# Altium PCB PCB1.PcbDoc
Units mil, origin at the board's own origin, x right, y up, seen from the top; angles counter-clockwise.
Board outline 4960 x 4220 mil, 2 copper layers (Top Layer, Bottom Layer); 58 components, 59 nets, 259 pads, 74 vias.
Unrouted connection lines stored in the file: 2.
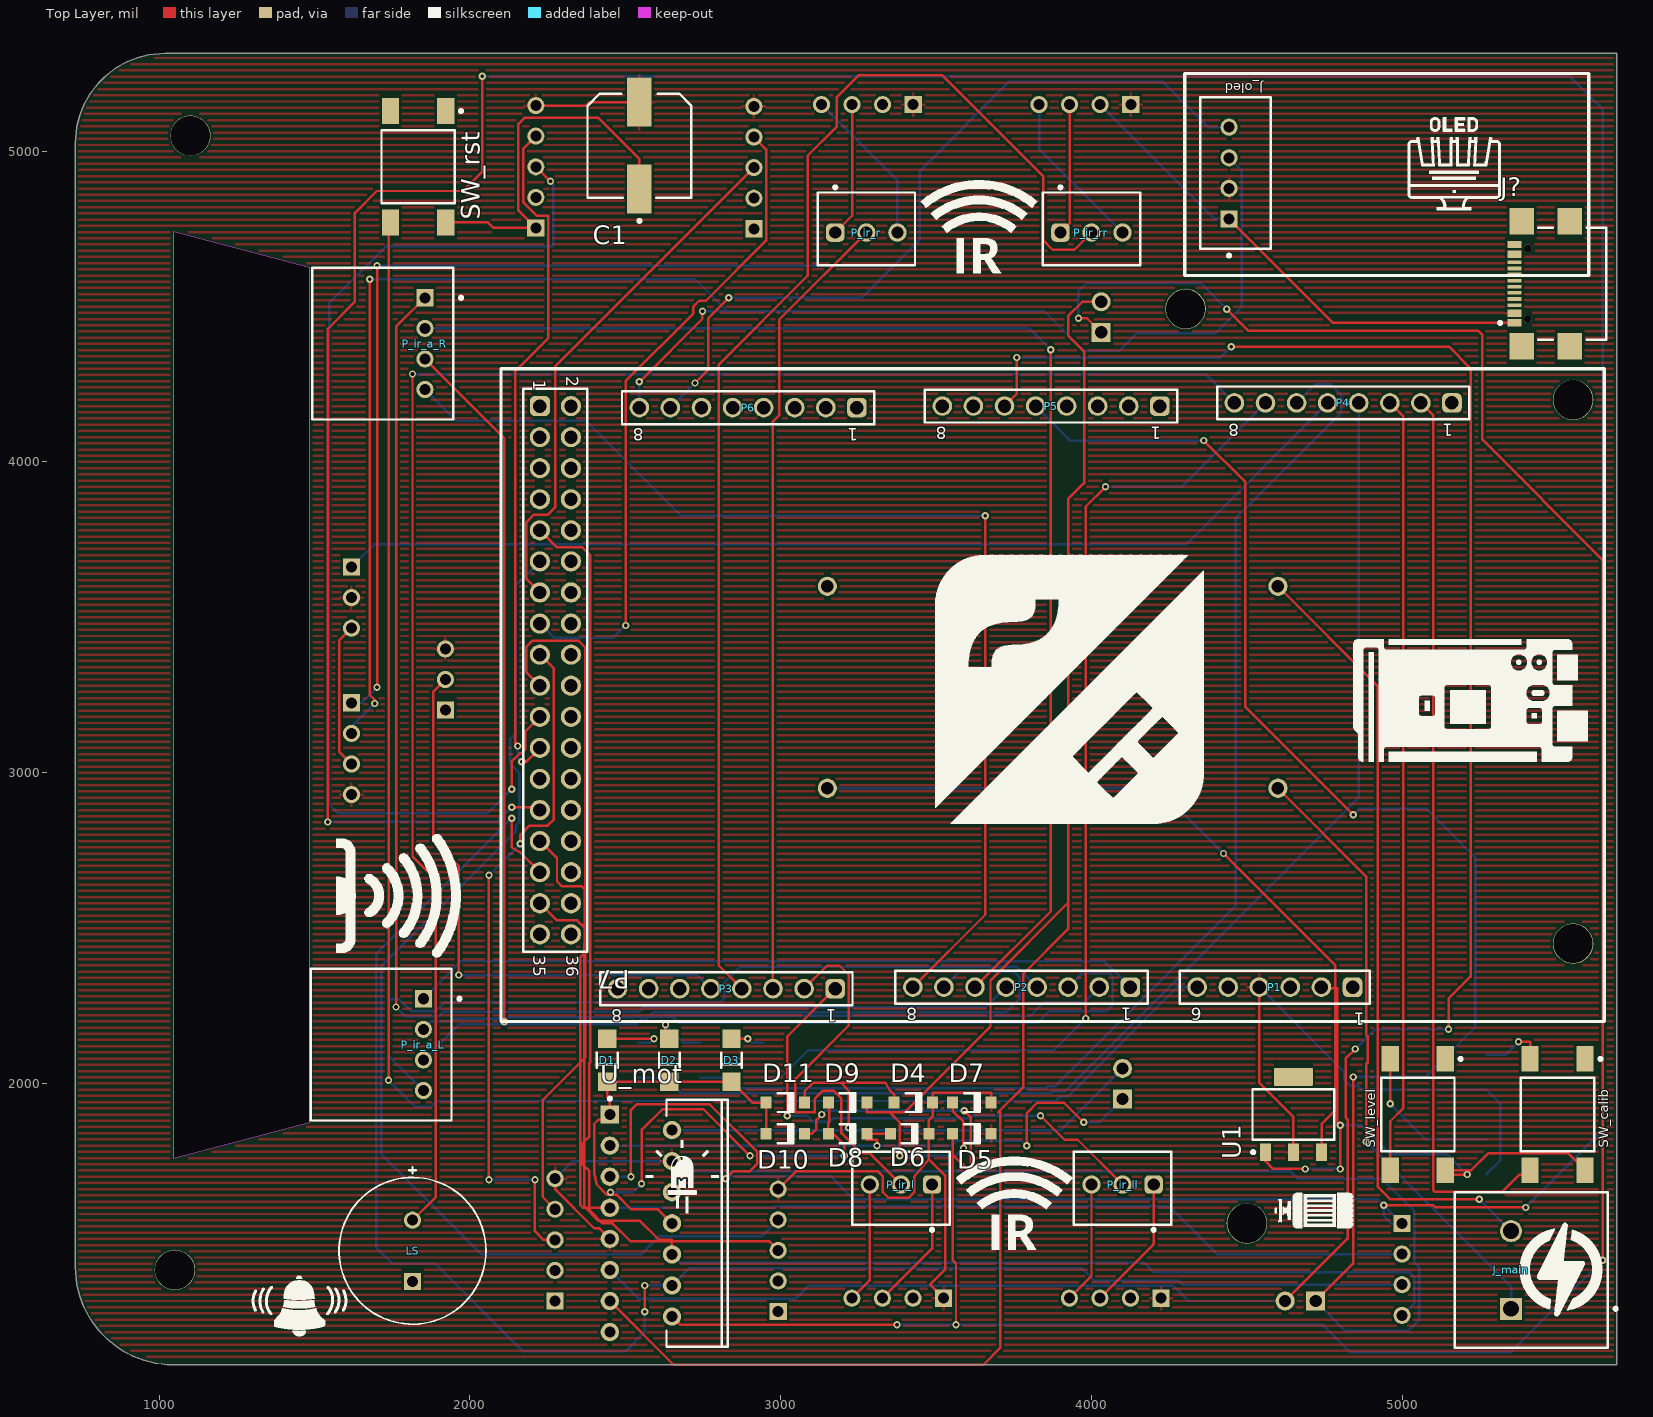
[diagram p0: Top Layer view]
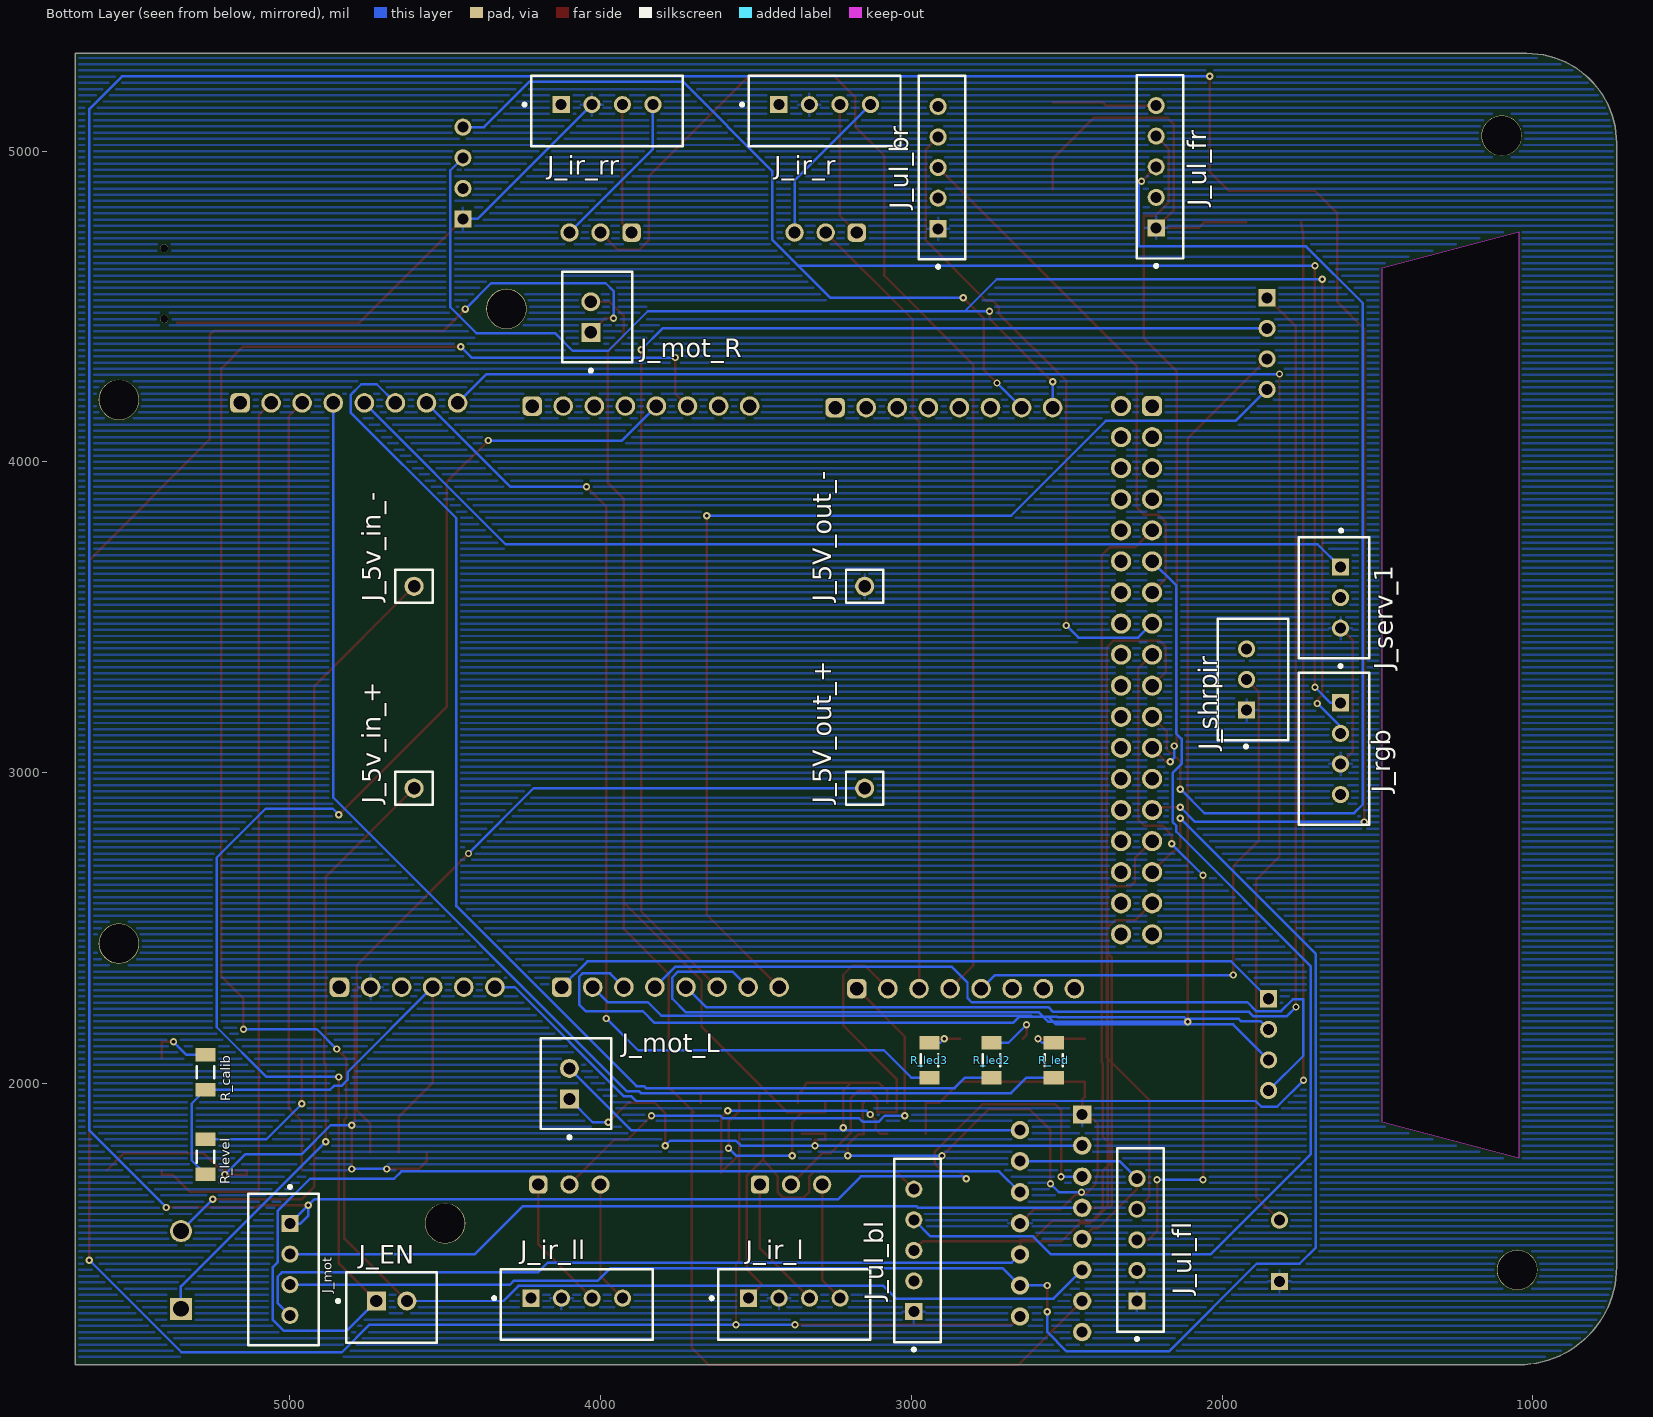
[diagram p1: Bottom Layer view, seen from below]
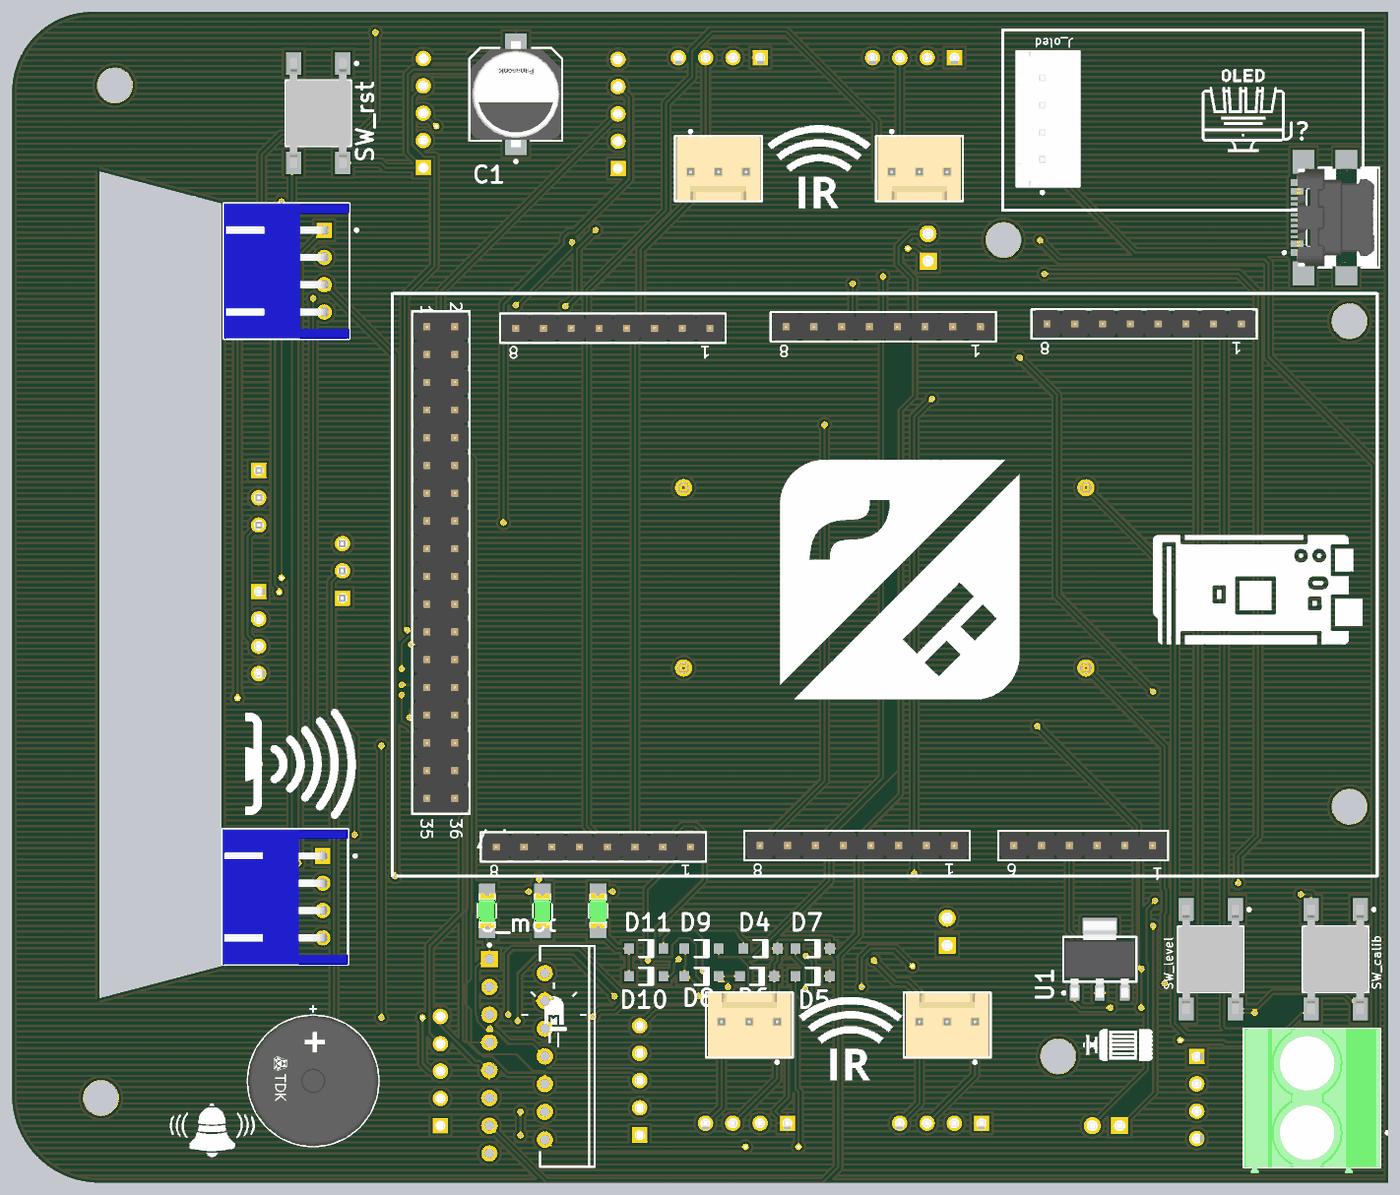
[diagram p2: 3D render of the assembled board from above, using the file's embedded part models]
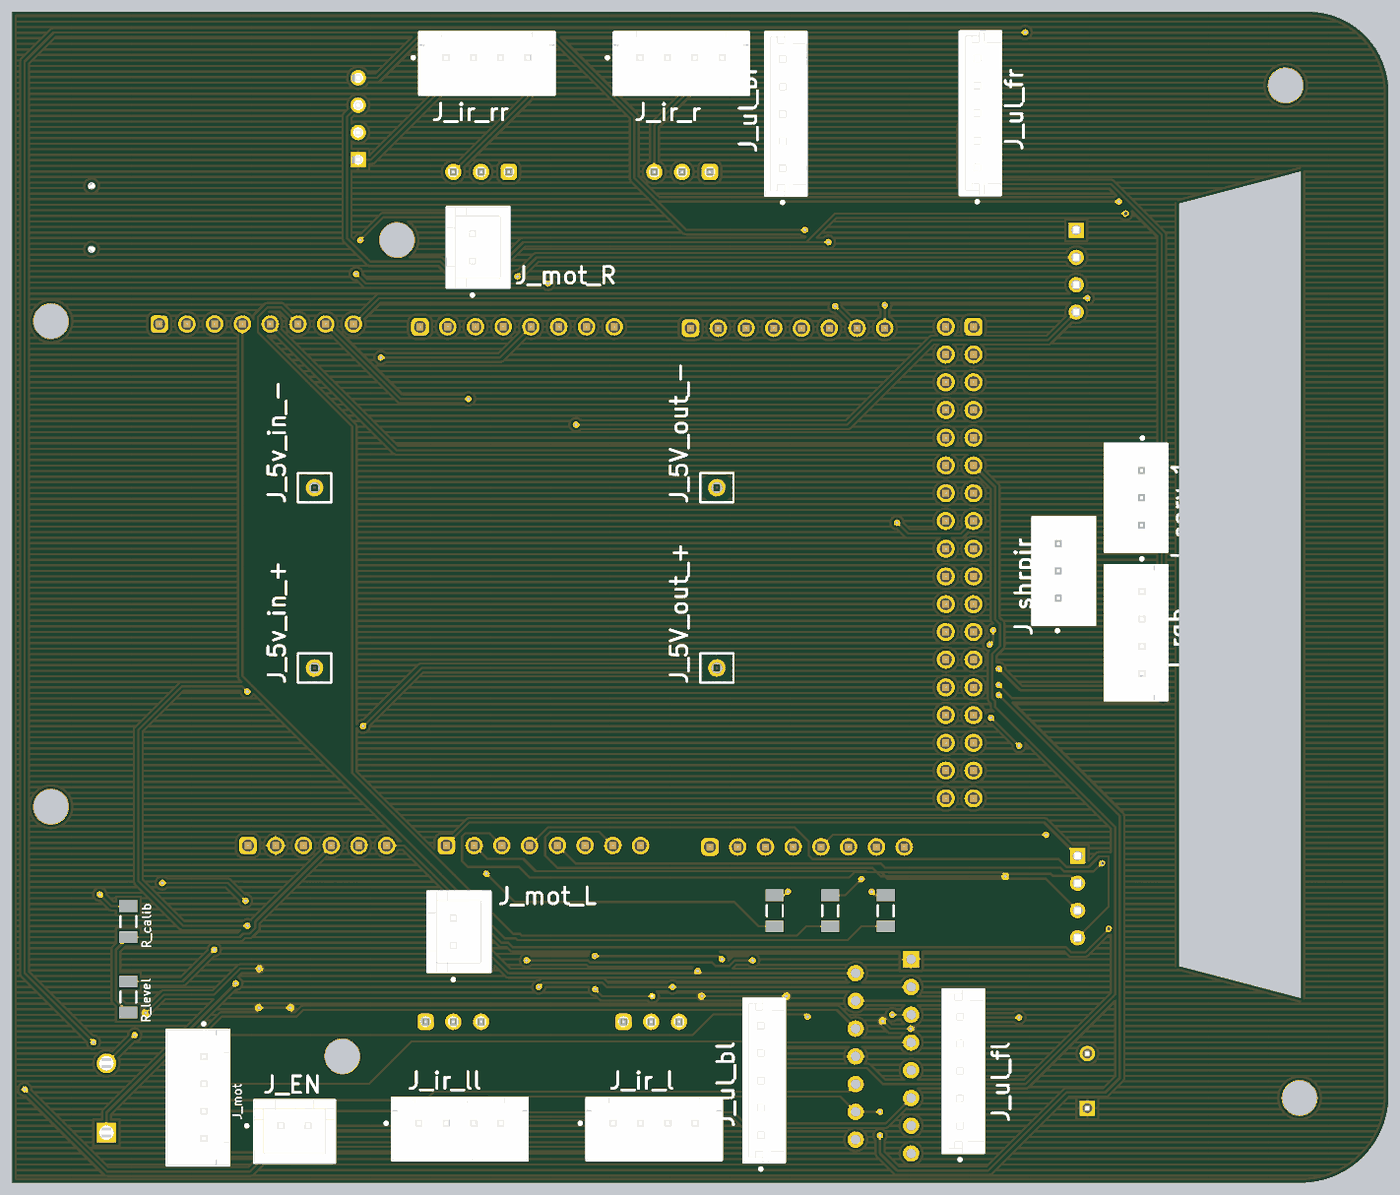
[diagram p3: 3D render of the assembled board from below, using the file's embedded part models]

## Layer stack, top to bottom
Top Solder: solder mask 0.4, Solder Resist, Dk 3.5
Top Layer: signal copper 1.4
Dielectric 1: dielectric 12.6, FR-4, Dk 4.8
Bottom Layer: signal copper 1.4
Bottom Solder: solder mask 0.4, Solder Resist, Dk 3.5

## Board outline
1020,5315 5690,5315 5690,1095 1045,1095 cw(c1045,1410) 730,1410 730,5025 cw(c1020,5025)
cut-out: 1045,4740.72 1045,1759.28 1485,1875 1485,4625

## Design rules (kind name [scope] priority, off if disabled: settings)
BoardOutlineClearance [All] p1: gap=7.87 ignorepadtopadclearanceinfootprint=FALSE
Clearance [All] p1: gap=8 ignorepadtopadclearanceinfootprint=FALSE except(9.84: Arc-Hole Track-Hole SMDPad-Hole THPad-Hole Via-Hole Fill-Hole Poly-Hole Region-Hole Text-Hole)
ComponentClearance [All] p1: gap=5 collisioncheckmode=3 verticalgap=5 showdistances=TRUE
DiffPairsRouting [All] p1: maxlimit=15 minlimit=8 mostfreqgap=8 toplayer_minwidth=8 toplayer_maxwidth=1000 toplayer_prefwidth=8 bottomlayer_minwidth=8 bottomlayer_maxwidth=1000 bottomlayer_prefwidth=8 maxuncoupledlength=500
Height [All] p1: minheight=0 maxheight=71497.94 prefheight=500
HoleSize [All] p1: absolutevalues=TRUE maxlimit=248.03 minlimit=11.81 maxpercent=80.000 minpercent=20.000
HoleToHoleClearance [All] p1: gap=9.84 allowstackedmicrovias=FALSE
MinimumAnnularRing [All] p1: minimumring=3
MinimumSolderMaskSliver [All] p1: minsoldermaskwidth=0
PlaneClearance [All] p1: clearance=8
PlaneConnect PlaneConnectPowerPads [InPadClass('PowerPads')] p1: planeconnectstyle=Direct reliefexpansion=20 reliefentries=4 reliefconductorwidth=10 reliefairgap=10
PlaneConnect [All] p2: pad.planeconnectstyle=Relief pad.reliefexpansion=11.81 pad.reliefentries=4 pad.reliefconductorwidth=8 pad.reliefairgap=8 via.planeconnectstyle=Direct via.reliefexpansion=11.81 via.reliefentries=4 via.reliefconductorwidth=5 via.reliefairgap=5
PolygonConnect PolygonConnectPowerPads [All vs (InPadClass('PowerPads'))] p1: connectstyle=Direct reliefconductorwidth=10 reliefentries=4 polygonreliefangle="90 Angle" airgapwidth=10
PolygonConnect [All] p2: thpad.connectstyle=Relief thpad.reliefconductorwidth=8 thpad.reliefentries=4 thpad.polygonreliefangle="90 Angle" thpad.airgapwidth=8 smdpad.connectstyle=Relief smdpad.reliefconductorwidth=8 smdpad.reliefentries=4 smdpad.polygonreliefangle="90 Angle" smdpad.airgapwidth=8 via.connectstyle=Direct via.reliefconductorwidth=5 via.reliefentries=4 via.polygonreliefangle="90 Angle" via.airgapwidth=5
RoutingVias [All] p1: holewidth=11.81 width=23.62 viastyle="Through Hole" minholewidth=11.81 minwidth=23.62 maxholewidth=23.62 maxwidth=259.84
SilkToSilkClearance [All] p1: silktosilkclearance=0
SilkToSolderMaskClearance [IsPad] p1: minsilkscreentomaskgap=5 clearancetoexposedcopper=TRUE
SolderMaskExpansion [All] p1: expansion=2.95 istentingtop=FALSE
Width [All] p1: maxlimit=1000 minlimit=11.93 preferedwidth=8 minimp=50.000000 maximp=50.000000 favimp=50.000000
20 further rules are at their usual default settings.

## Components (designator, comment, footprint, x,y, rotation, side; value= is the part's Value field where it differs from the comment)
C1 "EEEFT1H221AP" FP-FTF-MFG 2545.4,5018.11 r90 top
D1 "HSMG-C150" FP-HSMG-C150-MFG 2441.64,2074.81 r90 top
D2 "HSMG-C150" FP-HSMG-C150-MFG 2641.64,2074.81 r90 top
D3 "HSMG-C150" FP-HSMG-C150-MFG 2841.64,2074.81 r90 top
D4 "1N4148W-7-F" DIOD-SOD123-2_V 3426.94,1938.74 r0 top
D5 "1N4148W-7-F" DIOD-SOD123-2_V 3614.93,1838.74 r0 top
D6 "1N4148W-7-F" DIOD-SOD123-2_V 3414.93,1838.74 r0 top
D7 "1N4148W-7-F" DIOD-SOD123-2_V 3614.93,1938.74 r0 top
D8 "1N4148W-7-F" DIOD-SOD123-2_V 3214.93,1838.74 r0 top
D9 "1N4148W-7-F" DIOD-SOD123-2_V 3214.93,1938.74 r0 top
D10 "1N4148W-7-F" DIOD-SOD123-2_V 3014.93,1838.74 r0 top
D11 "1N4148W-7-F" DIOD-SOD123-2_V 3014.93,1938.74 r0 top
J? "USB4110-GF-A" FP-USB4110-GF-A-MFG 5506.36,4573.6 r90 top
J_5v_in_+ "PBC01SAAN" FP-PBC01SAAN-MFG 4600,2950 r0 bottom
J_5v_in_- "PBC01SAAN" FP-PBC01SAAN-MFG 4600,3600 r0 bottom
J_5V_out_+ "PBC01SAAN" FP-PBC01SAAN-MFG 3150,2950 r0 bottom
J_5V_out_- "PBC01SAAN" FP-PBC01SAAN-MFG 3150,3600 r0 bottom
J_EN "B2B-XH-A(LF)(SN)" FP-B2B-XH-A_LF_SN-MFG 4672.24,1279.33 r180 bottom
J_ir_l "B4B-XH-A(LF)(SN)" FP-B4B-XH-A_LF_SN-MFG 3376.38,1288.38 r0 bottom
J_ir_ll "B4B-XH-A(LF)(SN)" FP-B4B-XH-A_LF_SN-MFG 4076.38,1288.38 r0 bottom
J_ir_r "B4B-XH-A(LF)(SN)" FP-B4B-XH-A_LF_SN-MFG 3278.74,5129.33 r0 bottom
J_ir_rr "B4B-XH-A(LF)(SN)" FP-B4B-XH-A_LF_SN-MFG 3978.74,5129.33 r0 bottom
J_main "1714955" PHOE-1714955_V 5350,1400 r90 top
J_mot "B4B-XH-A(LF)(SN)" FP-B4B-XH-A_LF_SN-MFG 5020.04,1401.61 r90 bottom
J_mot_L "B2B-XH-A(LF)(SN)" FP-B2B-XH-A_LF_SN-MFG 4079.33,1999.21 r90 bottom
J_mot_R "B2B-XH-A(LF)(SN)" FP-B2B-XH-A_LF_SN-MFG 4010.49,4466.31 r90 bottom
J_oled "B4B-XH-A(LF)(SN)" FP-B4B-XH-A_LF_SN-MFG 4463.46,4929.7 r270 top
J_rgb "B4B-XH-A(LF)(SN)" FP-B4B-XH-A_LF_SN-MFG 1639.33,3077.36 r90 bottom
J_serv_1 "B3B-XH-A(LF)(SN)" FP-B3B-XH-A_LF_SN-MFG 1639.33,3563.42 r270 bottom
J_shrpir "B3B-XH-A(LF)(SN)" FP-B3B-XH-A_LF_SN-MFG 1900,3300 r90 bottom
J_ul_bl "B5B-EH-A(LF)(SN)" FP-B5B-EH-A_LF_SN-MFG 2980,1462.92 r90 bottom
J_ul_br "B5B-EH-A(LF)(SN)" FP-B5B-EH-A_LF_SN-MFG 2901.62,4947.24 r90 bottom
J_ul_fl "B5B-EH-A(LF)(SN)" FP-B5B-EH-A_LF_SN-MFG 2261.81,1496.85 r90 bottom
J_ul_fr "B5B-EH-A(LF)(SN)" FP-B5B-EH-A_LF_SN-MFG 2200,4950 r90 bottom
LS "SD1209T5-A1" FP-SD1209-MFG 1815,1461.57 r90 top
P1 "61300611121" 61300611121 4590,2310 r180 top
P2 "61300811121" 61300811121 3775,2310 r180 top
P3 "61300811121" 61300811121 2825,2305 r180 top
P4 "61300811121" 61300811121 4810,4190 r180 top
P5 "61300811121" 61300811121 3870,4180 r180 top
P6 "61300811121" 61300811121 2895,4175 r180 top
P7 "61303621121" 61303621121 2275,3330 r270 top
P_ir_a_L "S4B-XH-A(LF)(SN)" JST-S4B-XH-A(LF)(SN)_V 1850,2125 r270 top
P_ir_a_R "S4B-XH-A(LF)(SN)" JST-S4B-XH-A(LF)(SN)_V 1855,4380.79 r270 top
P_ir_l "61900311121" 61900311121 3386.77,1662.95 r0 top
P_ir_ll "61900311121" 61900311121 4100,1662.95 r0 top
P_ir_r "61900311121" 61900311121 3275.37,4750 r180 top
P_ir_rr "61900311121" 61900311121 4000,4750 r180 top
R_calib "ERJ-8GEY0R00V" RESC3216X70X50NL05T20 5271.15,2035.83 r90 bottom
R_led "ERJ-8GEY0R00V" RESC3216X70X50NL05T20 2541.62,2074.81 r90 bottom
R_led2 "ERJ-8GEY0R00V" RESC3216X70X50NL05T20 2741.62,2074.81 r90 bottom
R_led3 "ERJ-8GEY0R00V" RESC3216X70X50NL05T20 2941.62,2074.81 r90 bottom
R_level "ERJ-8GEY0R00V" RESC3216X70X50NL05T20 5271.15,1764.17 r90 bottom
SW_calib "FSM4JSMA" TECO-FSM4JSMA_V 5500,1900 r0 top
SW_level "FSM4JSMA" TECO-FSM4JSMA_V 5050,1900 r0 top
SW_rst "FSM4JSMA" TECO-FSM4JSMA_V 1833.36,4950 r0 top
U1 "LM1117MPX-3.3/NOPB" DCY0004A_L 4650,1900 r90 top
U_mot "L298N" STM-FM-15 2550,1550 r0 top

## Footprints (in the part's own frame and the unit in brackets; to place one, negate y for a bottom-side part, rotate by r counter-clockwise, add the part's x,y. Pads: shape width x height; smd on the part's side, far side on the other; paste and mask are expansions set on the pad)
61300611121 [mm] "Pin Header, pitch 2.54 mm, THT, Vertical, single row, 6p"
  rrect50% 1.6x1.6 hole 1.1: 1(-6.35,0)
  round 1.6 hole 1.1: 2(-3.81,0) 3(-1.27,0) 4(1.27,0) 5(3.81,0) 6(6.35,0)
  silkscreen extent -7.77,-1.34 7.77,1.34, body extent -7.62,-1.27 7.62,1.27, height 8.57
61300811121 [mm] "Pin Header, pitch 2.54 mm, THT, Vertical, single row, 8p"
  rrect50% 1.6x1.6 hole 1.1: 1(-8.89,0)
  round 1.6 hole 1.1: 2(-6.35,0) 3(-3.81,0) 4(-1.27,0) 5(1.27,0) 6(3.81,0) 7(6.35,0) 8(8.89,0)
  silkscreen extent -10.31,-1.34 10.31,1.34, body extent -10.16,-1.27 10.16,1.27, height 8.57
61303621121 [mm] "Pin Header, pitch 2.54 mm, THT, Vertical, dual row, 36p"
  rrect50% 1.65x1.65 hole 1.1: 1(-21.59,-1.27)
  round 1.65 hole 1.1: 2(-21.59,1.27) 3(-19.05,-1.27) 4(-19.05,1.27) 5(-16.51,-1.27) 6(-16.51,1.27) 7(-13.97,-1.27) 8(-13.97,1.27) 9(-11.43,-1.27) 10(-11.43,1.27) 11(-8.89,-1.27) 12(-8.89,1.27) 13(-6.35,-1.27) 14(-6.35,1.27) 15(-3.81,-1.27) 16(-3.81,1.27) 17(-1.27,-1.27) 18(-1.27,1.27) 19(1.27,-1.27) 20(1.27,1.27) 21(3.81,-1.27) 22(3.81,1.27) 23(6.35,-1.27) 24(6.35,1.27) 25(8.89,-1.27) 26(8.89,1.27) 27(11.43,-1.27) 28(11.43,1.27) 29(13.97,-1.27) 30(13.97,1.27) 31(16.51,-1.27) 32(16.51,1.27) 33(19.05,-1.27) 34(19.05,1.27) 35(21.59,-1.27) 36(21.59,1.27)
  silkscreen extent -23.01,-2.61 23.01,2.61, body extent -22.86,-2.54 22.86,2.54, height 8.59
61900311121 [mm] "2.54mm Male Locking Header, 3p"
  rrect50% 1.5x1.5 hole 1: 1(2.54,0.3)
  round 1.5 hole 1: 2(0,0.3) 3(-2.54,0.3)
  silkscreen extent -3.98,-3.52 3.98,2.97, body extent -3.81,-2.9 3.81,2.9, height 11.53
DCY0004A_L [mm] "SOT223, 4-Leads, Body 6.7x3.7mm, Pitch 2.3mm, IPC High Density"
  rrect11% 1.45x0.9 smd: 1(-3.075,2.3) 2(-3.075,0) 3(-3.075,-2.3)
  rrect7% 1.45x3.15 smd: 4(3.075,0)
  silkscreen extent -3.2,-3.35 2.05,3.42, body extent -3.5,-3.25 3.5,3.25, height 1.62
DIOD-SOD123-2_V [mm] "SOD123, 2-Leads, Body 2.7x1.55mm, Height 1.45mm"
  rect 0.9x0.95 smd: 1(-1.575,0) 2(1.575,0)
  silkscreen extent -0.63,-0.83 0.64,0.77, body extent -1.35,-0.77 1.35,0.77, height 1.45
FP-B2B-XH-A_LF_SN-MFG [mm]
  rect 1.55x1.55 hole 1 paste-1000 mask+0: 1(-1.25,0.525)
  round 1.55 hole 1 paste-1000 mask+0: 2(1.25,0.525)
  silkscreen extent -4.5,-2.87 3.7,2.88, body extent -3.7,-2.88 3.7,2.88, height 7
FP-B3B-XH-A_LF_SN-MFG [mm]
  rect 1.4x1.4 hole 0.9 paste-1000 mask+0: 1(-2.5,0.525)
  round 1.4 hole 0.9 paste-1000 mask+0: 2(0,0.525) 3(2.5,0.525)
  silkscreen extent -5.6,-2.87 4.95,2.88, body extent -4.95,-2.88 4.95,2.89, height 7
FP-B4B-XH-A_LF_SN-MFG [mm]
  rect 1.4x1.4 hole 0.9 paste-1000 mask+0: 1(3.75,-0.525)
  round 1.4 hole 0.9 paste-1000 mask+0: 2(1.25,-0.525) 3(-1.25,-0.525) 4(-3.75,-0.525)
  silkscreen extent -6.2,-2.88 6.88,2.87, body extent -6.2,-2.88 6.2,2.88, height 7
FP-B5B-EH-A_LF_SN-MFG [mm]
  rect 1.4x1.4 hole 0.9 paste-1000 mask+0: 1(-5,0.3)
  round 1.4 hole 0.9 paste-1000 mask+0: 2(-2.5,0.3) 3(0,0.3) 4(2.5,0.3) 5(5,0.3)
  silkscreen extent -8.22,-1.9 7.5,1.9, body extent -7.5,-1.9 7.5,1.9, height 6
FP-FTF-MFG [mm]
  rect 4x2 smd paste+0 mask+0: 1(-3.55,0) 2(3.55,0)
  silkscreen extent -6.27,-4.25 4.25,4.25, body extent -5.8,-4.5 5.8,4.5, height 0.25
FP-HSMG-C150-MFG [mm]
  rect 1.5x1.5 smd paste+0 mask+0: 1(-1.75,0) 2(1.75,0)
  silkscreen extent -0.6,-0.85 0.6,0.85, body extent -2.6,-0.95 2.6,0.95, height 0.25
FP-PBC01SAAN-MFG [mm]
  round 1.57 hole 1.02 paste-1000 mask+0: 1(0,0)
  silkscreen extent -1.53,-1.34 1.53,1.34, body extent -1.27,-1.27 1.27,1.27, height 7.62
FP-SD1209-MFG [mm]
  rect 1.4x1.4 hole 0.9 paste-1000 mask+0: 1(-2.5,0)
  round 1.4 hole 0.9 paste-1000 mask+0: 2(2.5,0)
  silkscreen extent -6,-6 6.85,6, body extent -6.1,-6.1 6.1,6.1, height 0.25
FP-USB4110-GF-A-MFG [mm]
  rect 2.18x2 smd paste+0 mask+0: 1(-5.11,3.105) 2(5.11,3.105) 3(-5.11,-0.825) 4(5.11,-0.825)
  rect 0.6x1.15 smd paste+0 mask+0: A1-B12(-3.2,3.68) A4-B9(-2.4,3.68) B1-A12(3.2,3.68) B4-A9(2.4,3.68)
  rect 0.3x1.15 smd paste+0 mask+0: A5(-1.25,3.68) A6(-0.25,3.68) A7(0.25,3.68) A8(1.25,3.68) B5(1.75,3.68) B6(0.75,3.68) B7(-0.75,3.68) B8(-1.75,3.68)
  round 0.65 hole 0.65 unplated paste-1000 mask+0: ""(-2.89,2.605) ""(2.89,2.605)
  silkscreen extent -4.57,-3.82 4.57,4.99, body extent -6.3,-3.92 6.3,4.36, height 0.25
JST-S4B-XH-A(LF)(SN)_V [mm] "Header, 4-Leads, Body 12.4x11.5mm, Pitch 2.5mm"
  rect 1.4x1.4 hole 0.9: 1(-3.75,0)
  round 1.4 hole 0.9: 2(-1.25,0) 3(1.25,0) 4(3.75,0)
  silkscreen extent -6.2,-9.2 6.2,3.08, body extent -6.2,-9.2 6.2,2.3, height 6.15
PHOE-1714955_V [mm] "Terminal Block, 2-Leads, Body 12.7x12.5mm, Pitch 6.35mm"
  rect 1.8x1.8 hole 1.3: 1(-3.175,0)
  round 1.8 hole 1.3: 2(3.175,0)
  silkscreen extent -6.35,-8.68 6.35,4.6, body extent -6.92,-7.9 6.35,4.6, height 21.51
RESC3216X70X50NL05T20 [mm] "Chip Resistor, 2-Leads, Body 3.20x1.60mm, IPC Medium Density"
  rect 1.1x1.65 smd: 1(-1.425,0) 2(1.425,0)
  silkscreen extent -0.5,-0.73 0.5,0.72, body extent -1.63,-0.82 1.62,0.82, height 0.7
STM-FM-15 [mm] "FM, 15-Leads, Body 20.2x5mm, Pitch 1.27mm"
  rect 1.5x1.5 hole 0.9: 1(-2.54,8.89)
  round 1.5 hole 0.9: 2(2.54,7.62) 3(-2.54,6.35) 4(2.54,5.08) 5(-2.54,3.81) 6(2.54,2.54) 7(-2.54,1.27) 8(2.54,0) 9(-2.54,-1.27) 10(2.54,-2.54) 11(-2.54,-3.81) 12(2.54,-5.08) 13(-2.54,-6.35) 14(2.54,-7.62) 15(-2.54,-8.89)
  silkscreen extent -2.66,-10.1 7.09,10.31, body extent -2.8,-10.1 7.09,10.1, height 21
TECO-FSM4JSMA_V [mm] "SMD, 4-Leads, Body 6x6mm, Pitch 4.5mm"
  rect 1.4x2.1 smd: 1(2.25,4.55) 2(2.25,-4.55) 3(-2.25,4.55) 4(-2.25,-4.55)
  silkscreen extent -3,-3 3.63,4.67, body extent -3,-5 3,5, height 5.08

## Part data
C1: library part CMP-05427-000092-1, "CAP ALUM 220UF 20% 50V SMD", Capacitance=220uF, Case/Package=Radial, Dielectric Material=Aluminium, ESR (Equivalent Series Resistance)=180mR, Leakage Current=110uA, Max Operating Temperature=105°C, Min Operating Temperature=-55°C, Package Quantity=500, Ripple Current=670mA, Tolerance=20%, Voltage=50V, Construction=Cylindrical, Contact Plating=Tin, Diameter=8mm, Height=10.2mm, Height - Seated (Max)=0.413inch, Lead Diameter=0.9mm, Lead Free="Lead Free", Lead Pitch=3.1mm, Length=10.2mm, Life (Hours)=2000Hour, Mount="Surface Mount", Number of Pins=2, Packaging="Tape and Reel", Radiation Hardening=No, REACH SVHC="No SVHC", Ripple Current (AC)=670mA, RoHS Compliant=Yes, Series=FT, Termination=SMD/SMT, Voltage Rating=50V, Voltage Rating (DC)=50V
D1 D2 D3: library part CMP-2000-05061-2, "LED GREEN DIFFUSED 1206 SMD", Colour=Green, Forward Current=20mA, Forward Voltage=2.2V, Manufacturer=Broadcom, Max Junction Temp=+95°C, Power Dissipation=65mW, Reverse Voltage=5V, Temperature="-40°C to +85°C", Temperature Range High=+85°C, Temperature Range Low=-40°C, Automotive=No, Category=Diode, ComponentLink2Description=Datasheet, ComponentLink2URL=https://docs.broadcom.com/docs/AV02-0551EN, Device Class L1=Optoelectronics, Device Class L2=LEDs, Device Class L3=unset, Digikey Description="LED GREEN DIFFUSED 1206 SMD", Height=1.2mm, Ipc Land Pattern Name=DIOCP320160X55, Lead Free=Yes, Led Orientation="Top View", Luminous Intensity=15mcd, Manufacturer Part Number=HSMG-C150, Mouser Description="LED Uni-Color Green 570nm 2-Pin Chip LED T/R", Octopart=https://octopart.com/hsmg-c150-broadcom-71131304, Package=HSMG-C150, Peak Emmision Wavelength=570nm, RoHS=TRUE, Viewing Angle=170°, Wavelength=572nm
D4 D5 D6 D7 D8 D9 D10 D11: library part CMP-2000-04932-2, "Fast Switching Diode, 100 V, 0.15 A, -65 to 150 degC, 2-Pin?SOD123, RoHS, Tape and Reel", If - Forward Current=0.15A, Ir - Reverse Current=1uA, Manufacturer=DiodesIncorporated, Max Surge Current=2A, Maximum Operating Temperature=+150C, Minimum Operating Temperature=-65C, Operating Temperature Range=-65Cto+150C, Package / Case=SOD-123, Package Reference=SOD123-2, Peak Reverse Voltage=100V, Vf - Forward Voltage=1.25V, Brand=DiodesIncorporated, Configuration=Single, Datasheet URL=http://www.farnell.com/datasheets/1915529.pdf, Datasheet Version="Rev. 24-2, 10/2013", Factory Pack Quantity=3000, Height=1.25mm, Length=2.85mm, Manufacturer URL=http://www.diodes.com/, Mounting Style=SMD/SMT, Package URL=http://www.diodes.com/datasheets/ds18004.pdf, Packaging=Reel, Product=SwitchingDiodes, Product Category=Diodes-GeneralPurpose,Power,Switching, Recovery Time=4ns, RoHS=True, Series=1N4148, Type=SwitchingDiode, Unit Weight=0.000353oz, Width=1.7mm
J?: library part CMP-245163-000002-1, "CONN USB 2.0 TYPE-C R/A SMT", Current Rating=3/4.25/1.25/0.25A, Manufacturer=GCT, Package=0, Temperature="-40°C to +85°C", Temperature Range High=+85°C, Temperature Range Low=-40°C, Voltage Rating=20V, Automotive=No, Category=Conn, ComponentLink2Description=Datasheet, ComponentLink2URL=https://gct.co/files/drawings/usb4110.pdf, Conn Orientation="Right Angle", Contact Material=Gold,Nickel, Device Class L1=Connectors, Device Class L2="USB Connectors", Device Class L3=unset, Digikey Description="CONN USB 2.0 TYPE-C R/A SMT", Height=3.46mm, Is Female=yes, Lead Free=Yes, Manufacturer Part Number=USB4110-GF-A, Number of Contacts=16, Octopart=https://octopart.com/usb4110-gf-a-gct-103941985, RoHS=TRUE, Shielding=true, Standoff Height=0.1mm, Usb Standard="USB 2.0"
J_5v_in_+ J_5v_in_- J_5V_out_+ J_5V_out_-: library part CMP-25680-000032-1, "CONN HEADER VERT 1POS", Color=Black, Package Quantity=1, Connector Type="Male Pin", Contact Material=Bronze, Contact Mating Length=0.23inch, Contact Plating=Gold, Gender=Male, Height=2.54mm, Housing Color=Black, Housing Material=Plastic, Lead Free="Lead Free", Length=2.54mm, Mount="Through Hole", Number of Contacts=1, Number of Positions=1, Number of Rows=1, Packaging=Bulk, Pitch=2.54mm, Termination=Solder, Width=2.54mm
J_EN J_mot_L J_mot_R: library part CMP-2000-05888-3, "CONN HEADER VERT 2POS 2.5MM", Color=Natural, Contact Resistance=20mR, Current Rating=3A, Housing Color=White, Insulation Resistance=1GR, Max Operating Temperature=85°C, Max Voltage Rating (AC)=250V, Min Operating Temperature=-25°C, Connector Type="Male Pin", Contact Material=Brass, Contact Plating=Tin, Contact Type="Male Pin", Depth=5.75mm, Fastening Type=Detent, Housing Material=Polyamide, Lead Free="Lead Free", Lead Pitch=2.5mm, Length=7.4mm, Max Current Rating=3A, Max Voltage Rating (DC)=250V, Mount="Through Hole", Number of Contacts=2, Number of Positions=2, Number of Rows=1, Orientation=Straight, Packaging=Bulk, Pitch=2.5mm, REACH SVHC="No SVHC", Series=XH, Termination=Solder, Voltage Rating=250V, Voltage Rating (AC)=250V, Wire/Cable Gauge=22AWG
J_ir_l J_ir_ll J_ir_r J_ir_rr J_mot J_oled J_rgb: library part CMP-17439-000250-1, "CONN HEADER VERT 4POS 2.5MM", Color=Natural, Contact Resistance=20mR, Current Rating=3A, Flammability Rating="UL94 V-0", Housing Color=White, Insulation Resistance=1GR, Max Operating Temperature=85°C, Max Voltage Rating (AC)=250V, Min Operating Temperature=-25°C, Package Quantity=500, Connector Type=Header, Contact Finish - Mating=TIN, Contact Material=Brass, Contact Plating=Tin, Contact Shape=Square, Contact Type="Male Pin", Depth=5.75mm, Fastening Type=Detent, Gender=Male, Housing Material=Polyamide, Insulation Color=Natural, Insulation Material=Nylon, Lead Free="Lead Free", Lead Pitch=2.5mm, Length=12.4mm, Mated Stacking Heights=9.8mm, Material=Polyamide, Max Current Rating=3A, Max Voltage Rating (DC)=250V, Mount="Through Hole", Number of Contacts=4, Number of Positions=4, Number of Rows=1, Orientation=Straight, Packaging=Bulk, Pitch=2.5mm, REACH SVHC="No SVHC", Series=XH, Termination=Solder, Voltage Rating=250V, Voltage Rating (AC)=250V, Wire/Cable Gauge=22AWG
J_main: library part CMP-2000-05797-1, "PC Terminal Block, Pitch 6.35 mm, 1 x 2 Position, Height 21.5 mm, Tail Lenght 5.1 mm, RoHS, Bulk", Manufacturer="Phoenix Contact", Package Description="PC Terminal Block, Pitch 6.35 mm, 1 x 2 Position, Height 21.5 mm, Tail Lenght 5.1 mm", Datasheet URL=http://media.digikey.com/pdf/Data%20Sheets/Phoenix%20Contact%20PDFs/1714955.pdf, Datasheet Version=02/2010, Manufacturer URL=http://www.phoenixcontact.com/, Mounting Technology=ThroughHole, Package Reference=1714955
J_serv_1 J_shrpir: library part CMP-17439-000014-3, "CONN HEADER VERT 3POS 2.5MM", Color=Natural, Contact Resistance=20mR, Current Rating=3A, Flammability Rating="UL94 V-0", Housing Color=White, Insulation Resistance=1GR, Max Operating Temperature=85°C, Max Voltage Rating (AC)=250V, Min Operating Temperature=-25°C, Connector Type=Header, Contact Finish - Mating=TIN, Contact Material=Brass, Contact Plating=Tin, Contact Shape=Square, Contact Type="Male Pin", Depth=5.75mm, Fastening Type=Detent, Gender=Male, Housing Material=Polyamide, Insulation Color=Natural, Insulation Material=Nylon, Lead Free="Lead Free", Lead Pitch=2.5mm, Length=9.9mm, Max Current Rating=3A, Max Voltage Rating (DC)=250V, Mount="Through Hole", Number of Contacts=3, Number of Positions=3, Number of Rows=1, Orientation=Straight, Packaging=Bulk, Pitch=2.5mm, REACH SVHC="No SVHC", Series=XH, Termination=Solder, Voltage Rating=250V, Voltage Rating (AC)=250V, Wire/Cable Gauge=22AWG
J_ul_bl J_ul_br J_ul_fl J_ul_fr: library part CMP-17439-000382-1, "CONN HEADER VERT 5POS 2.5MM", Color=Natural, Current Rating=3A, Flammability Rating="UL94 V-0", Housing Color=White, Voltage Rating=250V, Connector Type=Header, Contact Finish - Mating=TIN, Contact Material=Brass, Contact Mating Length=0.13inch, Contact Plating=Tin, Contact Shape=Square, Contact Type="Male Pin", Fastening Type=Friction, Gender=Male, Insulation Color=Natural, Insulation Material=Nylon, Lead Free="Lead Free", Mated Stacking Heights=8.1mm, Mount="Through Hole", Number of Contacts=5, Number of Positions=5, Number of Rows=1, Orientation=Straight, Packaging=Bulk, Pitch=2.5mm, Series=EH, Termination=Solder
LS: library part CMP-08413-000009-1, "AUDIO MAGNETIC XDCR 3-6V TH", Current Rating=60mA, Frequency=2.048kHz, Max Operating Temperature=85°C, Min Operating Temperature=-40°C, Operating Supply Voltage=5V, Package Quantity=100, Self Resonant Frequency=2.05kHz, Diameter=12mm, Height=9mm, Lead Free="Lead Free", Max Supply Current=60mA, Mount="Through Hole", Number of Pins=2, Number of Terminals/Pins=2, Operating Supply Current=60mA, Packaging=Tray, Sensing Method=Magnetic, Series=SD, Termination="PC Pins", Voltage Rating (DC)=5V, Washable=No
P1: library part CMP-1502-01070-2, Color=Black, Contact Resistance=20mΩ, Current Rating=3A, Max Operating Temperature=105°C, Min Operating Temperature=-40°C, Operating Supply Voltage=250V, Connector Type="Male Pin", Contact Gender=Male, Contact Material=Copper, Contact Mating Length=5.9944mm, Contact Plating=Gold, Gender=Male, Height=8.89mm, Housing Material=PBT, Lead Free="Lead Free", Lead Pitch=2.54mm, Mount="Through Hole", NexarPartId=20084590, Number of Contacts=6, Number of Pins=6, Number of Positions=6, Number of Rows=1, Orientation=Vertical, Packaging=Bulk, Pitch=2.54mm, REACH SVHC=Unknown, RoHS=Compliant, Termination="Through Hole", Voltage Rating=250V
P2 P3 P4 P5 P6: library part CMP-1502-01076-2, Color=Black, Contact Resistance=20mΩ, Current Rating=3A, Max Operating Temperature=105°C, Min Operating Temperature=-40°C, Operating Supply Voltage=250V, Connector Type="Male Pin", Contact Material=Copper, Contact Mating Length=5.9944mm, Contact Plating=Gold, Gender=Male, Height=8.54mm, Lead Pitch=2.54mm, Mount="Through Hole", NexarPartId=32855533, Number of Contacts=8, Number of Pins=8, Number of Positions=8, Number of Rows=1, Orientation=Vertical, Packaging=Bulk, Pitch=2.54mm, REACH SVHC=Unknown, RoHS=Compliant, Termination=Solder, Voltage Rating=250V
P7: library part CMP-1502-01131-2, Color=Black, Contact Resistance=20mΩ, Current Rating=3A, Operating Supply Voltage=250V, Connector Type="Male Pin", Contact Material=Copper, Contact Mating Length=5.9944mm, Contact Plating=Gold, Gender=Male, Lead Pitch=2.54mm, Mount="Through Hole", NexarPartId=32855576, Number of Contacts=36, Number of Pins=36, Number of Positions=36, Number of Rows=2, Orientation=Vertical, Packaging=Bulk, Pitch=2.54mm, REACH SVHC=Unknown, RoHS=Compliant, Row Spacing=2.54mm, Termination=Solder
P_ir_a_L P_ir_a_R: library part CMP-1755-00007-1, "Male Header, Pitch 2.5 mm, 1 x 4 Position, Height 6.1 mm, Tail Length 3.4 mm, -25 to 85 degC, RoHS, Bulk", ComponentLink1Description="Manufacturer URL", ComponentLink1URL=http://www.jst.com/home2.html, ComponentLink2Description=Datasheet, ComponentLink2URL=http://www.jst-mfg.com/product/pdf/eng/eXH.pdf, DatasheetVersion=May-16, PackageDescription="Male Header, Pitch 2.5 mm, 1 x 4 Position, Height 6.1 mm, Tail Length 3.4 mm", PackageReference=S4B-XH-A(LF)(SN)
P_ir_l P_ir_ll P_ir_r P_ir_rr: library part CMP-1502-00585-2, Color=Beige, Contact Resistance=20mΩ, Current Rating=3A, Flammability Rating="UL94 V-0", Insulation Resistance=1GΩ, Max Operating Temperature=105°C, Min Operating Temperature=-40°C, Operating Supply Voltage=250V, Connector Type="Male Pin", Contact Gender=Male, Contact Material=Copper, Contact Mating Length=7.493mm, Contact Plating=Tin, Fastening Type=Friction, Gender=Male, Height=12.5mm, Housing Material=Nylon, Lead Pitch=2.54mm, Length=7.62mm, Mount="Through Hole", NexarPartId=18818222, Number of Contacts=3, Number of Pins=3, Number of Positions=3, Number of Rows=1, Orientation=Vertical, Packaging=Bulk, Pitch=2.54mm, REACH SVHC=Unknown, RoHS=Compliant, Termination="Through Hole", Voltage Rating=250V, Width=7.66mm
R_calib R_led R_led2 R_led3 R_level: library part CMP-2003-00541-1, Manufacturer=Panasonic, Part Number=ERJ-8GEY0R00V
SW_calib SW_level SW_rst: library part CMP-2000-05602-2, "Swicth, SPST, 24 V, -35 to 85 degC, 4-Pin SMD, RoHS, Tape and Reel", Case\/Package=SMD/SMT, Contact Current Rating=50mA, Contact Resistance=100mOhm, Manufacturer="TE Connectivity", Max Operating Temperature=85degC, Max Voltage Rating (DC)=12V, Min Operating Temperature=-35degC, Operating Force=1.57N, Package Description="4-Pin Surface Mount Device, Body 6 x 6 mm, Pitch 4.5 mm", Package Quantity=750, Voltage Rating=24V, Actuator Length=0.055inch, Actuator Material=Polyamide, Contact Material=CopperAlloy, Contact Plating=Silver, Current Rating=50mA, Datasheet URL=http://www.te.com/commerce/DocumentDelivery/DDEController?Action=showdoc&DocId=Customer+Drawing%7F2-1437565-7%7FV%7Fpdf%7FEnglish%7FENG_CD_2-1437565-7_V.pdf%7F4-1437565-2, Datasheet Version="Rev. V, 02/2015", Electrical Life=100000Cycles, Illumination Type=Illuminated, Length=6mm, Manufacturer URL=http://www.te.com/, Mechanical Life=100000Cycles, Mount=SurfaceMount, Mounting Technology=SurfaceMount, Orientation=Straight, Package Reference=FSM4JSMA, Packaging=LoosePiece, REACH SVHC=Unknown, RoHSCompliant=true, Switch Travel=0.25mm, Termination=GullWing, Throw Configuration=SPST, Voltage Rating (DC)=24V, Width=6mm
U1: library part CMP-0062-01639-4, "800mA Low-Dropout Linear Regulator, 4-pin SOT-223, Pb-Free", Manufacturer="Texas Instruments", PackageTopMarking=XYTT*N05A, PowerWise=N, Code_IPC=SOT223-4, Code_JEDEC=TO-261-AA, ComponentLink1Description="Datasheet URL", ComponentLink1URL=http://www.ti.com/general/docs/lit/getliterature.tsp?genericPartNumber=LM1117-N&fileType=pdf, CompType="LDO IC", High-Reliability=Y, PackageDescription="Molded SOT-223, 6.50 x 3.56 x 1.6mm Body, 4 Lead, 2.3mm Pitch", PackageReference=DCY0004A, PartNumber=LM1117MPX-3.3/NOPB, PinCount=4, RoHS=Y
U_mot: library part CMP-2000-06526-1, "Dual Full-Bridge Driver, 4.8 to 46 V, -40 to 150 degC, 15-Pin FM (MW 15L), RoHS, Tube", Driver Case Style=Multiwatt, Manufacturer=STMicroelectronics, Operating Temperature Max=130°C, Operating Temperature Min=-25°C, Output Current=2A, Output Voltage=46V, Package Description="15-Pin Flange Mount, Body 5 x 19.6 mm, Pitch 1.27 mm", Package Reference=FM-15, PartNumber=L298, Supply Voltage Max=7V, Supply Voltage Min=4.5V, Automotive Qualification Standard=-, Datasheet URL=https://datasheet.ciiva.com/15109/getdatasheetpartid-50682-15109332.pdf, Datasheet Version=01/2000, Manufacturer URL=http://www.st.com/, Motor Type=FullBridge, Mounting Technology=ThroughHole, MSL=-, No. of Outputs=4Outputs, No. of Pins=15Pins, Packaging=Each, Product Range=-, SVHC=NoSVHC(17-Dec-2015)

## Free pads (board coordinates)
  round 129.92 hole 125.98: 2(1050,1400) 3(1100,5050) 4(5550,4200) 5(5550,2450) 6(4500,1550) 7(4302.89,4492.79)

## Via types
v1: diameter 23.62, hole 11.81, Top Layer to Bottom Layer, 74 vias

## Nets (pads, with @x,y where several pads share a name; then routed paths per layer and width w, separated by ;. In a path a pad name is that pad's centre, name@x,y a point inside that pad or via, vN(x,y) a via of type N, cw(c..) or ccw(c..) an arc to the next point about the centre after c; other vN are vias at no path point)
5V: C1.2 D4.2 D5.2 D6.2 D7.2 J?.A4-B9 J_ir_l.1 J_ir_ll.1 J_ir_r.1 J_ir_rr.1 J_oled.2 J_rgb.4 J_serv_1.2 J_shrpir.3 J_ul_bl.5 J_ul_br.5 J_ul_fl.5 J_ul_fr.5 P1.4 R_calib.1 R_level.1 U1.2 U_mot.4 U_mot.9 | length 4382.9
  Top Layer w8: J_ul_fr.5 2373,5146.85 2384.02,5157.87 C1.2 ; J_ul_fl.5 2273.62,1659.81 2400,1533.44 2416.56,1533.44 U_mot.9 ; J_ul_bl.5 3049.04,1717 3312.5,1717 3329,1700.5 3329,1650 3346,1633 3412.5,1633 3429,1649.5 3429,1700 3476.94,1756 ; J_ir_l.1 3480.53,1352.53 3529,1401 3529,1703.94 3476.94,1756 ; D7.2 3676.94,1970 3488.95,1970 D4.2 3488.95,1894.01 3476.94,1882 D6.2 3476.94,1756 ; P1.4 4540,2002 4650,1892 U1.2
  Bottom Layer w8: J_ul_fl.5 2329.92,1750 U_mot.4 ; P1.4 4813.45,2036.55 4813.45,2012.5 4833.54,1992.42 4857.58,1992.42 4870.28,1979.72 R_calib.1 5316,1934.87 5316,1752.92 R_level.1
GND: C1.1 D1.1 D2.1 D3.1 D8.1 D9.1 D10.1 D11.1 J?.A1-B12 J_5V_out_-.1 J_ir_l.2 J_ir_ll.2 J_ir_r.2 J_ir_rr.2 J_oled.1 J_rgb.3 J_serv_1.3 J_shrpir.1 J_ul_bl.1 J_ul_br.1 J_ul_fl.1 J_ul_fr.1 LS.1 P1.2 SW_calib.2 SW_level.2 SW_rst.2 U1.1 U_mot.1 U_mot.8 | length 7813.3
  Top Layer w8: J_rgb.3 1579,3067.81 1579,3425.34 J_serv_1.3 ; SW_rst.2 2058,4770.87 2075.72,4753.15 J_ul_fr.1 2156,4808.96 2156,5088 2175,5107 2413.4,5107 2545.4,4975 C1.1 ; v1(2452,1650) v1@2452,1641.53 ; v1(2552,1677) 2552,1850 2619,1917 2751,1917 v1(2901,1767) ; U_mot.8 2605,1595 2519,1595 2472.47,1641.53 v1@2452,1641.53 ; D10.1 D11.1 2908.81,1938.74 D3.1 D2.1 D1.1 2441.64,1956.36 2450,1948 U_mot.1 2433,1883 2412.5,1883 2400,1870.5 2400,1712 2408,1675 2441.47,1641.53 v1@2452,1641.53 ; D9.1 3156.62,1938.74 3156.62,1876.41 3152.92,1872.71 D8.1 3152.92,1837 3170,1837 3204,1803 v1(3204,1767) ; J_oled.1 4777.24,4447.61 J?.A1-B12 ; U1.1 4559.45,1750 4584.45,1725 v1(4688,1725) ; P1.2 4743,2307 4791,2307 4791,1875 v1(4800,1866) v1(4800,1725) ; v1(5209,1707) 5138.58,1707 SW_level.2 5221.87,1720.87 5276,1775 5534.45,1775 SW_calib.2
  Bottom Layer w8: v1(2452,1650) 2525,1650 v1(2552,1677) ; v1(2901,1767) v1(3204,1767) ; J_ir_rr.2 4395.89,4782.06 J_oled.1 ; v1(4688,1725) v1(4800,1725) ; v1(4800,1866) 4868,1866 4962,1772 5144,1772 v1(5209,1707)
NetD1_2: D1.2 R_led.2 | length 206
  Top Layer w8: D1.2 v1(2592,2143.71)
  Bottom Layer w8: R_led.2 2579.2,2130.91 v1(2592,2143.71)
NetD2_2: D2.2 R_led2.2 | length 187.2
  Top Layer w8: v1(2629,2189) 2629,2156.34 D2.2
  Bottom Layer w8: v1(2629,2189) 2687.09,2130.91 R_led2.2
NetD3_2: D3.2 R_led3.2 | length 105.3
  Top Layer w8: D3.2 v1(2893.91,2143.71)
  Bottom Layer w8: v1(2893.91,2143.71) 2906.71,2130.91 R_led3.2
NetD4_1: D4.1 D11.2 J_mot_L.2 U_mot.2 | length 2076.9
  Top Layer w8: D11.2 3076.94,1975 3104.94,2003 3193.21,2003 ; v1(3219,1858) 3219,1975 3193.21,2003 ; D4.1 3364.93,1964.07 3350,1979 3336.93,2003 3193.21,2003
  Bottom Layer w8: U_mot.2 v1@3219,1850 ; v1(3219,1858) v1@3219,1850 ; J_mot_L.2 3901.57,1850 v1@3219,1850
NetD5_1: D5.1 D10.2 J_mot_R.1 U_mot.14 | length 9333.9
  Top Layer w8: U_mot.14 2676,1224 v1(3374,1224) ; D10.2 3100,1838.74 3115,1853.74 3115,1883 v1(3132,1900) ; D5.1 3552.92,1772.08 ; v1(3564,1224) 3564,1421 3552.92,1432.08 3552.92,1772.08 ; v1(3590,1912) 3612,1890 3612,1713 3552.92,1772.08 ; v1(3958,4462) 3986.25,4462 J_mot_R.1 ; v1(4435,4492) 4504,4423 5244,4423 5258,4409 5258,4072 5645,3685 v1(5645,1431)
  Bottom Layer w8: v1(3132,1900) 3144,1912 v1(3590,1912) ; v1(3374,1224) v1(3564,1224) 4743,1224 4832,1135 5349,1135 v1(5645,1431) ; v1(3958,4462) 3958,4550 3983,4575 4352,4575 v1(4435,4492)
NetD6_1: D6.1 D8.2 J_mot_L.1 U_mot.3 | length 1986.7
  Top Layer w8: v1(3310,1800) 3310,1819 3276.94,1819 D8.2 D6.1 ; v1(3792,1800) 3792,1905 3825,1938 3912,1938 v1(3975,1875)
  Bottom Layer w8: U_mot.3 v1(3310,1800) 3548.38,1800 3564.19,1815.81 3776.19,1815.81 v1(3792,1800) ; v1(3975,1875) 4025,1875 J_mot_L.1
NetD7_1: D7.1 D9.2 J_mot_R.2 U_mot.13 | length 6528.1
  Top Layer w8: U_mot.13 2655,1095 3652,1095 3707,1150 3707,1908 3700,1908 3781,1989 3781,2353 3925,2497 3925,2581.5 ; D9.2 3276.94,1908 3350,1908 ; v1(3383,1767) 3383,1875 3350,1908 ; D7.1 3552.92,1912.08 3588,1877 v1(3588,1792) ; J_mot_R.2 3970.73,4515.52 3925,4469.79 3925,4406.59 3976,4355.59 3976,3932 3925,3881 3925,2581.5 ; 3350,1908 3400,1908 3675,2183 3675,2331.5 3925,2581.5
  Bottom Layer w8: v1(3383,1767) 3563,1767 v1(3588,1792)
NetJ_5v_in_+_1: J_5v_in_+.1 J_main.1 | length 1989.6
  Top Layer w8: J_5v_in_+.1 4884,2666 4884,2155.62 4888.81,2150.81 4888.81,2067.05 4884,2062.23 v1(4884,1813)
  Bottom Layer w8: v1(4884,1813) 5350,1347 J_main.1
NetJ_5v_in_-_1: J_5v_in_-.1 J_main.2 | length 2553.2
  Top Layer w8: J_5v_in_-.1 4921,3279 4921,1668 4962,1627 v1(5248,1627)
  Bottom Layer w8: v1(5248,1627) J_main.2
NetJ_5V_out_+_1: J_5V_out_+.1 U1.3 | length 2489.7
  Top Layer w8: v1(4425,2740) 4784,2381 4784,1913.45 4740.55,1870 U1.3
  Bottom Layer w8: J_5V_out_+.1 4215,2950 v1(4425,2740)
NetJ_EN_1: J_EN.1 P5.5 U_mot.6 | length 7445.4
  Top Layer w8: v1(4361,4069) 4495,3935 4495,3212 v1(4842,2865) ; J_EN.1 4842,1420.54 v1(4842,2021)
  Bottom Layer w8: U_mot.6 2717,1717 4640.57,1717 4664.19,1693.38 4934.62,1693.38 5039,1589 5039,1424 5055,1408 5055,1241 5018,1204 4817.46,1204 J_EN.1 ; P5.5 3931,4069 v1(4361,4069) ; v1(4842,2021) 5075,2021 5235,2181 5235,2727 5078,2884 4861,2884 v1(4842,2865)
NetJ_EN_2: J_EN.2 P5.6 U_mot.11 | length 7316.2
  Top Layer w8: P5.6 3759,4219 v1(3759,4336) ; v1(4450,4371) 5150,4371 5220,4301 5220,2344 5149,2273 v1(5149,2175) ; J_EN.2 4824,1500.97 4824,1884 4818,1890 4818,2080 v1(4849,2111)
  Bottom Layer w8: U_mot.11 2542,1308 3049,1308 3089.61,1348.61 4264,1348.61 4312.61,1300 J_EN.2 ; v1(3759,4336) 4415,4336 v1(4450,4371) ; v1(4849,2111) 4913,2175 v1(5149,2175)
NetJ_ir_l_3: J_ir_l.3 P_ir_l.1 | length 431.8
  Top Layer w8: J_ir_l.3 3486.77,1468.66 P_ir_l.1
NetJ_ir_l_4: J_ir_l.4 P_ir_l.3 | length 389.7
  Top Layer w8: J_ir_l.4 3286.77,1367.08 P_ir_l.3
NetJ_ir_ll_3: J_ir_ll.3 P_ir_ll.1 | length 437.3
  Top Layer w8: J_ir_ll.3 4200,1481.88 P_ir_ll.1
NetJ_ir_ll_4: J_ir_ll.4 P_ir_ll.3 | length 395.2
  Top Layer w8: J_ir_ll.4 4000,1380.31 P_ir_ll.3
NetJ_ir_r_3: J_ir_r.3 P_ir_r.1 | length 434.2
  Top Layer w8: P_ir_r.1 3229.53,4792.35 J_ir_r.3
NetJ_ir_r_4: J_ir_r.4 P_ir_r.3 | length 513
  Bottom Layer w8: J_ir_r.4 3375.37,4905.73 P_ir_r.3
NetJ_ir_rr_3: J_ir_rr.3 P_ir_rr.1 | length 424
  Top Layer w8: P_ir_rr.1 3929.53,4767.72 J_ir_rr.3
NetJ_ir_rr_4: J_ir_rr.4 P_ir_rr.3 | length 523.2
  Bottom Layer w8: J_ir_rr.4 3831.1,5007.09 P_ir_rr.3
NetJ_mot_1: J_mot.1 P7.27 U_mot.5 | length 14488
  Top Layer w8: v1(1542.12,2841.5) 1542.12,4428.34 1629.61,4515.83 1629.61,4801.61 1700,4872 1978,4872 2039,4933 v1(2039,5241) ; v1(2134,2889) 2216,2889 P7.27 ; v1(2518,1700) 2518,1915 2536,1933 2771.5,1933 2925,1779.5 2925,1742 2900,1717 2847,1717 v1(2823,1693) ; v1(4940,1608) 5100,1608 5107,1601 v1(5397,1601)
  Bottom Layer w8: v1(1542.12,2841.5) 2086.5,2841.5 v1(2134,2889) ; v1(2039,5241) 5540,5241 5645,5136 5645,1849 v1(5397,1601) ; U_mot.5 v1(2518,1700) ; v1(2823,1693) 2831,1701 3162,1701 3236,1627 4921.62,1627 J_mot.1 4965.75,1549.25 4940,1575 v1(4940,1608)
NetJ_mot_2: J_mot.2 P7.29 U_mot.7 | length 3988.7
  Top Layer w8: P7.29 2280,2725 2280,2650 2295,2635 2359,2635 2370,2624 2370,2422 2355,2407 2355,1608 2363,1600 U_mot.7
  Bottom Layer w8: U_mot.7 2978.79,1600 2983,1604.21 4250.62,1604.21 4404,1450.83 J_mot.2
NetJ_mot_3: J_mot.3 P7.31 U_mot.12 | length 5436.7
  Top Layer w8: v1(2134,2853) 2134,2759.4 2161.6,2743.4 P7.31 ; v1(2562,1265) v1(2562,1350)
  Bottom Layer w8: v1(2134,2853) 1698,2417 1698,1472 1750,1420 1889,1420 2171,1138 2500,1138 2562,1200 v1(2562,1265) ; v1(2562,1350) U_mot.12 2705,1405 3969,1405 4009.39,1364.61 4279.58,1364.61 4291.78,1352.4 J_mot.3
NetJ_mot_4: J_mot.4 P7.33 U_mot.10 | length 4008.4
  Top Layer w8: P7.33 2280,2525 2345,2525 2370,2500 2370,2453 2367,2450 2367,1605 2414,1558 2547,1558 2608,1497 2650,1497 U_mot.10
  Bottom Layer w8: U_mot.10 2677,1423 4170,1423 4201,1392 5025,1392 5039,1378 5039,1293.6 J_mot.4
NetJ_serv_1_1: J_serv_1.1 P4.5 | length 3360.1
  Bottom Layer w8: J_serv_1.1 1691.81,3735 4305,3735 P4.5
NetJ_shrpir_2: J_shrpir.2 P3.5 | length 1831
  Top Layer w8: J_shrpir.2 1881,3260.33 1881,2782 1964,2699 v1(1964,2349)
  Bottom Layer w8: v1(1964,2349) 2731,2349 P3.5
NetJ_ul_bl_3: J_ul_bl.3 P7.9 | length 2984.2
  Top Layer w8: P7.9 2280,3725 2362,3725 2387,3700 2387,2068 2384,2065 2384,1829.25 2360.9,1806.15 2360.9,1741.27 2384,1718.17 2384,1593 2427,1550 2459,1550 2517.47,1491.53 2963.2,1491.53 J_ul_bl.3
NetJ_ul_bl_4: J_ul_bl.4 P7.11 | length 3600.7
  Bottom Layer w8: P7.11 2147,3602 2147,3125 2131.82,3109.82 2129.88,3109.82 2129.88,3028.38 2157.81,3000.44 2157.81,2840.15 2147,2829.34 2147,2810 1714,2377 1714,1773 2037,1450 2550,1450 2608,1508 2938.47,1508 J_ul_bl.4
NetJ_ul_br_3: J_ul_br.3 P7.13 | length 1715.6
  Top Layer w8: P7.13 2180.52,3624.48 2180.52,3805 2205,3829.48 2250,3829.48 2275,3854.48 2275,4308.81 J_ul_br.3
NetJ_ul_br_4: J_ul_br.4 P7.15 | length 2098.9
  Top Layer w8: v1(2501,3474) 2501,4260.5 2718.92,4478.42 2718.92,4500.23 2737.5,4518.81 2759.31,4518.81 2953,4712.5 2953,5006.1 J_ul_br.4
  Bottom Layer w8: P7.15 2270,3435 2462,3435 v1(2501,3474)
NetJ_ul_fl_3: J_ul_fl.3 P7.17 | length 2218.5
  Top Layer w8: v1(2061,1690) v1(2061,2670) ; v1(2162,2771) 2162,2800 2192,2830 2250,2830 2270,2850 2270,3335 P7.17 ; v1(2209,1690) 2209,1525 2237.15,1496.85 J_ul_fl.3
  Bottom Layer w8: v1(2061,1690) v1(2209,1690) ; v1(2061,2670) v1(2162,2771)
NetJ_ul_fl_4: J_ul_fl.4 P7.19 | length 2232
  Top Layer w8: P7.19 2180.52,3324.48 2180.52,3405 2200,3424.48 2350,3424.48 2371,3403.48 2371,2084 2234.06,1947.06 2234.06,1634.84 J_ul_fl.4
NetJ_ul_fr_3: J_ul_fr.3 P7.21 | length 3593.6
  Top Layer w8: v1(2134,2947) 2134,3036.14 2160.06,3062.2 2165.01,3062.2 2177.81,3075 2177.81,3132.81 P7.21 ; J_ul_fr.3 2258.81,4903 v1(2259,4903)
  Bottom Layer w8: v1(2134,2947) 2057,2870 1575,2870 1547,2898 1547,4511.52 1729.48,4694 2268,4694 2268,4894 v1(2259,4903)
NetJ_ul_fr_4: J_ul_fr.4 P7.23 | length 2215.1
  Top Layer w8: v1(2154,3086) 2145,3095 2145,4291.44 2252,4398.44 2252,4793 2214.44,4793 2172,4835.44 2172,5008.61 J_ul_fr.4 ; v1(2167,3035) 2180,3035 P7.23
  Bottom Layer w8: v1(2154,3086) 2154,3048 v1(2167,3035)
NetLS_2: LS.2 P4.8 | length 5468.7
  Top Layer w8: LS.2 1890,1635 1890,2655 1815,2730 v1(1815,4283)
  Bottom Layer w8: v1(1815,4283) 4367,4283 P4.8
NetP2_1: P2.1 P_ir_a_L.1 | length 2359.2
  Bottom Layer w8: P_ir_a_L.1 1970.36,2393 4042,2393 P2.1
NetP2_2: P2.2 P_ir_a_L.2 | length 2231.2
  Bottom Layer w8: P_ir_a_L.2 1876.79,2201 1939,2201 1946,2208 2117,2208 2122,2213 2529,2213 2530,2214 2610,2214 2614,2218 3804,2218 3848,2262 3977,2262 P2.2
NetP2_3: P2.3 P_ir_a_L.3 | length 2564.6
  Bottom Layer w8: P_ir_a_L.3 1964.21,2190 2534,2190 2558,2214 2653,2214 2672,2195 3826,2195 3864,2233 4048,2233 4069,2254 4069,2343.37 4058.37,2354 3969,2354 P2.3
NetP2_4: P2.4 P_ir_a_L.4 | length 2558.6
  Bottom Layer w8: P_ir_a_L.4 1738,2089.36 1738,2271 1772.08,2271 1810,2233.08 1890,2233.08 1918.43,2261.5 2805.5,2261.5 2819,2275 2819,2325 2870,2376 3759,2376 P2.4
NetP2_5: P2.5 P_ir_a_R.1 | length 4337.6
  Top Layer w8: v1(1762,2246) 1765.81,2249.81 1762,2253.62 1762,4435.42 P_ir_a_R.1
  Bottom Layer w8: v1(1762,2246) 1790.92,2217.08 1899.64,2217.08 1912.74,2230.18 2543.46,2230.18 2558.79,2245.5 3660.5,2245.5 P2.5
NetP2_6: P2.6 P_ir_a_R.2 | length 4194.6
  Top Layer w8: P2.6 3869,2554 v1(3869,4361)
  Bottom Layer w8: P_ir_a_R.2 3800,4430 v1(3869,4361)
NetP2_7: P2.7 P_ir_a_R.3 | length 4268.5
  Top Layer w8: P_ir_a_R.3 2110,4076.57 v1(2110,2199)
  Bottom Layer w8: v1(2110,2199) 2559.38,2199 2589.19,2228.81 3725,2228.81 3769,2272.81 3769,2341 3750,2360 3575,2360 P2.7
NetP2_8: P2.8 P_ir_a_R.4 | length 3584.7
  Top Layer w8: P2.8 3658,2543 v1(3658,3827)
  Bottom Layer w8: P_ir_a_R.4 1956.15,4132 2374,4132 2679,3827 v1(3658,3827)
NetP3_1: P3.1 P_ir_ll.2 | length 1659.8
  Top Layer w8: v1(3021,1896) 3021,2151 P3.1 ; v1(3836,1896) 3913.12,1818.88 3955.88,1818.88 P_ir_ll.2
  Bottom Layer w8: v1(3021,1896) 3085.49,1896 3105.3,1876.19 3155.81,1876.19 3167.8,1888.18 3606.44,1888.18 3614.26,1896 v1(3836,1896)
NetP3_2: P3.2 P_ir_l.2 | length 1282.7
  Top Layer w8: P3.2 3149,2379 3190,2379 3219,2350 3219,2187 3047,2015 3047,1908 3109,1908 3109,1950 3135,1976 3171,1976 3195.19,1951.81 3195.19,1840.04 3259.04,1776.19 3285.34,1776.19 P_ir_l.2
NetP3_3: P3.3 P_ir_r.2 | length 2557.6
  Top Layer w8: P3.3 2975,4130 2995,4150 2995,4457.82 P_ir_r.2
NetP3_4: P3.4 P_ir_rr.2 | length 4281.5
  Top Layer w8: P3.4 2801,2379 2801,4314 3087,4600 3087,4986 3181,5080 3181,5175 3250,5244 3520,5244 3845,4919 3845,4713 3875,4683 3944.81,4683 P_ir_rr.2
NetP4_2: P4.2 SW_calib.4 | length 2901.2
  Top Layer w8: P4.2 5099,4151 5099,1657 5105.15,1650.85 5320.85,1650.85 5377,1707 5411.42,1707 SW_calib.4
NetP4_3: P4.3 SW_level.4 | length 2505
  Top Layer w8: P4.3 5004,4146 5004,1921 4961.42,1878.42 SW_level.4
NetP4_4: P4.4 R_led.1 | length 4003
  Bottom Layer w8: R_led.1 2629,2018.71 2678.71,1969 3869.79,1969 3876.39,1975.6 3915.77,1975.6 4860,2919.83 P4.4
NetP4_6: P4.6 R_led2.1 | length 3947.8
  Bottom Layer w8: R_led2.1 2827,2018.71 2860.71,1985 3853.79,1985 3860.39,1991.6 3884.6,1991.6 4464,2571 4464,3819 4804,4159 4804,4216 4770,4250 4720,4250 P4.6
NetP4_7: P4.7 R_led3.1 | length 3482.6
  Top Layer w8: v1(3981,2209) 3981,3856 v1(4045,3920)
  Bottom Layer w8: R_led3.1 3000,2018.71 3088.29,2107 3879,2107 v1(3981,2209) ; v1(4045,3920) 4290,3920 P4.7
NetR_calib_2: R_calib.2 SW_calib.3 | length 212.6
  Top Layer w8: v1(5374,2134) 5411.42,2134 SW_calib.3
  Bottom Layer w8: R_calib.2 5331.93,2091.93 v1(5374,2134)
NetR_level_2: R_level.2 SW_level.3 | length 501.6
  Top Layer w8: v1(4961.42,1934.58) SW_level.3
  Bottom Layer w8: v1(4961.42,1934.58) 5075.72,1820.28 R_level.2
RESET: P1.6 SW_rst.4 | length 5558.1
  Top Layer w8: v1(1738,2010) 1738,4727.22 SW_rst.4
  Bottom Layer w8: v1(1738,2010) 1823,1925 1873,1925 1891.61,1943.61 3885.79,1943.61 3901.79,1959.6 3925.6,1959.6 4276,2310 P1.6
SCL: J_oled.3 J_rgb.2 P6.8 | length 5429.8
  Top Layer w8: v1(1677,4588) 1677,3251 1693,3235 v1(1693,3223) ; v1(2545,4258) 2748,4461 v1(2748,4485)
  Bottom Layer w8: J_rgb.2 1618.66,3148.66 v1(1693,3223) ; v1(1677,4588) 2725,4588 2828,4485 ; P6.8 v1(2545,4258) ; v1(2748,4485) 2828,4485 ; J_oled.3 4483,4938.7 4483,4498 4400,4415 4147,4415 4090,4358 3975,4358 3848,4485 2828,4485
SDA: J_oled.4 J_rgb.1 P6.7 | length 5640.8
  Top Layer w8: v1(1701,3275) v1(1701,4631) ; v1(2724,4254) 2766,4296 2766,4462 v1(2833,4529)
  Bottom Layer w8: J_rgb.1 1651,3225 v1(1701,3275) ; v1(1701,4631) 3363,4631 ; P6.7 v1(2724,4254) ; v1(2833,4529) 3261,4529 3363,4631 ; J_oled.4 4374.66,5077.34 4228,5224 3735,5224 3448,4937 3448,4716 3363,4631
pads on no net: J?. J?.1 J?.2 J?.3 J?.4 J?.A5 J?.A6 J?.A7 J?.A8 J?.B1-A12 J?.B4-A9 J?.B5 J?.B6 J?.B7 J?.B8 J_ul_bl.2 J_ul_br.2 J_ul_fl.2 J_ul_fr.2 P1.1 P1.3 P1.5 P3.6 P3.7 P3.8 P4.1 P5.1 P5.2 P5.3 P5.4 P5.7 P5.8 P6.1 P6.2 P6.3 P6.4 P6.5 P6.6 P7.1 P7.2 P7.3 P7.4 P7.5 P7.6 P7.7 P7.8 P7.10 P7.12 P7.14 P7.16 P7.18 P7.20 P7.22 P7.24 P7.25 P7.26 P7.28 P7.30 P7.32 P7.34 P7.35 P7.36 SW_calib.1 SW_level.1 SW_rst.1 SW_rst.3 U1.4 U_mot.15

## Polygon pours and split planes (outlines as drawn)
5V on Top Layer "NONET_L-01_P-001" (hatched Horizontal grid 20 track 8, remove dead copper, pour order 0): 350,5500 5950,5500 5950,850 5800,1000 300,1000
GND on Bottom Layer "NONET_L-01_P-001" (hatched Horizontal grid 20 track 8, remove dead copper, pour order 1): 450,5650 6050,5650 6000,5600 6000,800 450,800 400,750

## Silkscreen, mask and mechanical layers (free items; w line width, h text height)
Top Overlay:
  drawing of 76 lines, arcs and shapes, not listed

## Text inside footprints (layer, text, board x,y; h text height)
P1: Top Overlay "1" at 4880,2228 h40 r180; Top Overlay "6" at 4354.96,2243.07 h40 r180
P2: Top Overlay "1" at 4129.72,2243.07 h40 r180; Top Overlay "8" at 3439.96,2243.07 h40 r180
P3: Top Overlay "1" at 3179.72,2238.07 h40 r180; Top Overlay "8" at 2489.96,2238.07 h40 r180
P4: Top Overlay "1" at 5164.72,4123.07 h40 r180; Top Overlay "8" at 4474.96,4123.07 h40 r180
P5: Top Overlay "1" at 4224.72,4113.07 h40 r180; Top Overlay "8" at 3534.96,4113.07 h40 r180
P6: Top Overlay "1" at 3249.72,4108.07 h40 r180; Top Overlay "8" at 2559.96,4108.07 h40 r180
P7: Top Overlay "1" at 2204.13,4263.86 h40 r270; Top Overlay "2" at 2310.43,4275.67 h40 r270; Top Overlay "35" at 2204.13,2411.89 h40 r270; Top Overlay "36" at 2310.43,2411.89 h40 r270